# Altium PCB PCB1.PcbDoc
Units mm, origin at the board's own origin, x right, y up, seen from the top; angles counter-clockwise.
Board outline 79.63 x 86.11 mm, 2 copper layers (Top Layer, Bottom Layer); 54 components, 21 nets, 216 pads, 48 vias.
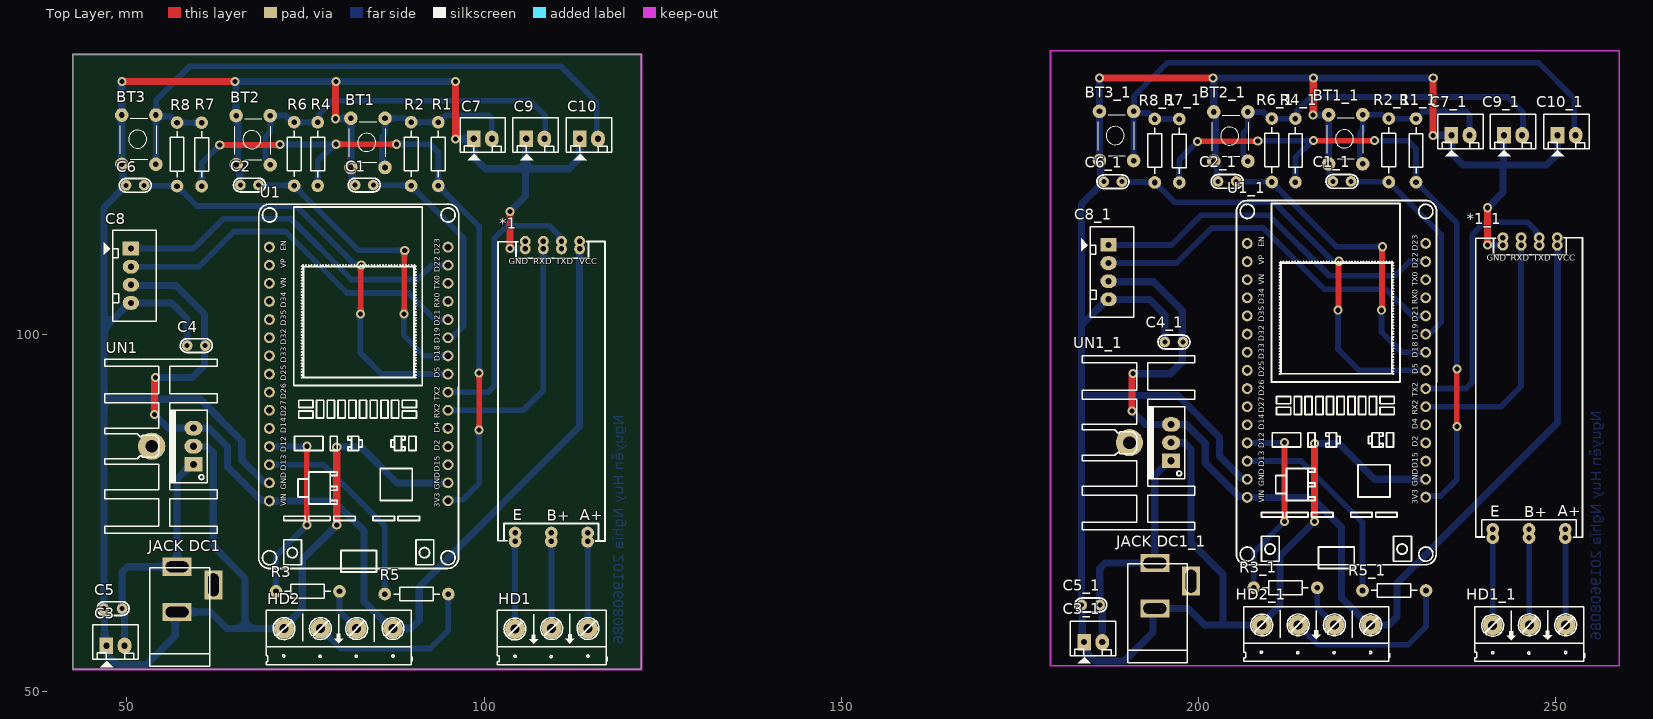
[diagram p0: Top Layer view]
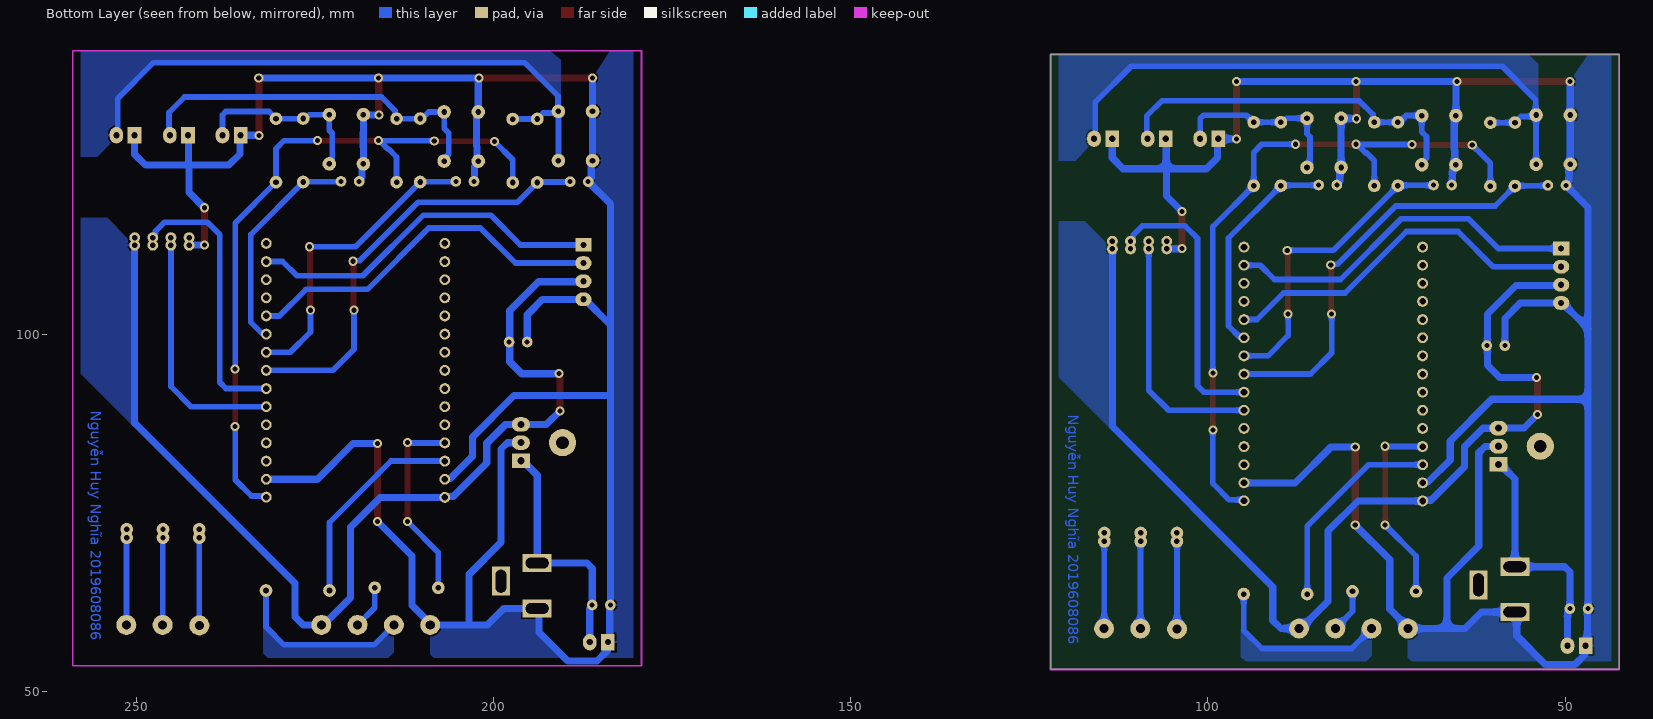
[diagram p1: Bottom Layer view, seen from below]

## Layer stack, top to bottom
Top Solder: solder mask 0.0102, Solder Resist, Dk 3.5
Top Layer: signal copper 0.0356
Dielectric 1: dielectric 0.32, FR-4, Dk 4.8
Bottom Layer: signal copper 0.0356
Bottom Solder: solder mask 0.0102, Solder Resist, Dk 3.5

## Board outline
42.418,53.086 42.418,139.192 122.047,139.192 122.047,53.086

## Design rules (kind name [scope] priority, off if disabled: settings)
Clearance [All] p1: gap=1 ignorepadtopadclearanceinfootprint=FALSE
PolygonConnect [All] p1: connectstyle=Relief reliefconductorwidth=0.254 reliefentries=4 polygonreliefangle="90 Angle" airgapwidth=0.254
RoutingVias [All] p1: holewidth=0.711 width=1.27 viastyle="Through Hole" minholewidth=0.711 minwidth=1.27 maxholewidth=0.711 maxwidth=1.27
SolderMaskExpansion [All] p1: expansion=0.102 istentingtop=FALSE
Width VCC5 [InNet('VCC5')] p1: maxlimit=1 minlimit=1 preferedwidth=1
Width VCC_IN [InNet('VCC_IN')] p2: maxlimit=1 minlimit=1 preferedwidth=1
Width VCC33 [InNet('VCC5')] p3: maxlimit=1 minlimit=1 preferedwidth=1
Width GND [InNet('GND')] p4: maxlimit=1 minlimit=1 preferedwidth=1
Width [All] p5: maxlimit=0.8 minlimit=0.8 preferedwidth=0.8
30 further rules are at their usual default settings.

## Classes and differential pairs
component class Sheet1: *1 BT1 BT2 BT3 C1 C2 C3 C4 C5 C6 C7 C8 C9 C10 HD1 HD2 "JACK DC1" R1 R2 R3 R4 R5 R6 R7 R8 U1 UN1

## Components (designator, comment, footprint, x,y, rotation, side; value= is the part's Value field where it differs from the comment)
*1 "TTL_RS485" "RS-485 Module" 109.106,89.916 r270 top
*1_1 "TTL_RS485" "RS-485 Module" 246.012,90.424 r270 top (schematic designator *1)
BT1 "MENU" "Nut Nhan 4 Chan Cam 6x6" 81.153,123.698 r90 top
BT1_1 "MENU" "Nut Nhan 4 Chan Cam 6x6" 218.059,124.206 r90 top (schematic designator BT1)
BT2 "INC" "Nut Nhan 4 Chan Cam 6x6" 65.075,124.079 r90 top
BT2_1 "INC" "Nut Nhan 4 Chan Cam 6x6" 201.981,124.587 r90 top (schematic designator BT2)
BT3 "DEC" "Nut Nhan 4 Chan Cam 6x6" 49.073,124.153 r90 top
BT3_1 "DEC" "Nut Nhan 4 Chan Cam 6x6" 185.979,124.661 r90 top (schematic designator BT3)
C1 "104" "tu gom" 83.223,120.904 r180 top
C1_1 "104" "tu gom" 220.129,121.412 r180 top (schematic designator C1)
C2 "104" "tu gom" 67.145,120.904 r180 top
C2_1 "104" "tu gom" 204.051,121.412 r180 top (schematic designator C2)
C3 "Header2" Header2 47.117,56.388 r0 top
C3_1 "Header2" Header2 184.023,56.896 r0 top (schematic designator C3)
C4 "104" "tu gom" 59.69,98.425 r180 top
C4_1 "104" "tu gom" 196.596,98.933 r180 top (schematic designator C4)
C5 "104" "tu gom" 48.044,61.595 r180 top
C5_1 "104" "tu gom" 184.95,62.103 r180 top (schematic designator C5)
C6 "104" "tu gom" 51.143,120.863 r180 top
C6_1 "104" "tu gom" 188.049,121.371 r180 top (schematic designator C6)
C7 "Header2" Header2 98.552,127.381 r0 top
C7_1 "Header2" Header2 235.458,127.889 r0 top (schematic designator C7)
C8 "LCD_I2C" Header4 50.546,112.014 r270 top
C8_1 "LCD_I2C" Header4 187.452,112.522 r270 top (schematic designator C8)
C9 "Header2" Header2 105.918,127.381 r0 top
C9_1 "Header2" Header2 242.824,127.889 r0 top (schematic designator C9)
C10 "Header2" Header2 113.411,127.381 r0 top
C10_1 "Header2" Header2 250.317,127.889 r0 top (schematic designator C10)
HD1 "Header 3" HED3 114.554,58.803 r180 top
HD1_1 "Header 3" HED3 251.46,59.311 r180 top (schematic designator HD1)
HD2 "Header 4" HED4 87.251,58.803 r180 top
HD2_1 "Header 4" HED4 224.157,59.311 r180 top (schematic designator HD2)
"JACK DC1" "JACK DC 5.5" "JACK DC 5.5" 59.563,64.287 r90 top value="Jac DC"
"JACK DC1_1" "JACK DC 5.5" "JACK DC 5.5" 196.469,64.795 r90 top value="Jac DC" (schematic designator "JACK DC1")
R1 "10K" R1/4W 93.599,129.692 r270 top value="R1/4W - 1K"
R1_1 "10K" R1/4W 230.505,130.2 r270 top value="R1/4W - 1K" (schematic designator R1)
R2 "1K" R1/4W 89.789,120.818 r90 top value="R1/4W - 1K"
R2_1 "1K" R1/4W 226.695,121.326 r90 top value="R1/4W - 1K" (schematic designator R2)
R3 "1k" R1/4W 79.756,64.008 r180 top value="R1/4W - 1K"
R3_1 "1k" R1/4W 216.662,64.516 r180 top value="R1/4W - 1K" (schematic designator R3)
R4 "10K" R1/4W 76.708,129.692 r270 top value="R1/4W - 1K"
R4_1 "10K" R1/4W 213.614,130.2 r270 top value="R1/4W - 1K" (schematic designator R4)
R5 "1k" R1/4W 94.996,63.627 r180 top value="R1/4W - 1K"
R5_1 "1k" R1/4W 231.902,64.135 r180 top value="R1/4W - 1K" (schematic designator R5)
R6 "1K" R1/4W 73.406,120.818 r90 top value="R1/4W - 1K"
R6_1 "1K" R1/4W 210.312,121.326 r90 top value="R1/4W - 1K" (schematic designator R6)
R7 "10K" R1/4W 60.452,129.637 r270 top value="R1/4W - 1K"
R7_1 "10K" R1/4W 197.358,130.145 r270 top value="R1/4W - 1K" (schematic designator R7)
R8 "1K" R1/4W 57.012,120.762 r90 top value="R1/4W - 1K"
R8_1 "1K" R1/4W 193.918,121.27 r90 top value="R1/4W - 1K" (schematic designator R8)
U1 "ESP32_MODULE copy" ESP32-WIFIMODULE-FOOTPRINT 84.582,92.71 r0 top
U1_1 "ESP32_MODULE copy" ESP32-WIFIMODULE-FOOTPRINT 221.488,93.218 r0 top (schematic designator U1)
UN1 "L78M05CP" QTO-220H2 59.309,84.328 r90 top
UN1_1 "L78M05CP" QTO-220H2 196.215,84.836 r90 top (schematic designator UN1)

## Footprints (in the part's own frame and the unit in brackets; to place one, negate y for a bottom-side part, rotate by r counter-clockwise, add the part's x,y. Pads: shape width x height; smd on the part's side, far side on the other; paste and mask are expansions set on the pad)
ESP32-WIFIMODULE-FOOTPRINT [mil]
  round 60 hole 36: 1(-575.9,768.25) 2(-575.9,668.25) 3(-575.9,568.25) 4(-575.9,468.25) 5(-575.9,368.25) 6(-575.9,268.25) 7(-575.9,168.25) 8(-575.9,68.25) 9(-575.9,-31.75) 10(-575.9,-131.75) 11(-575.9,-231.75) 12(-575.9,-331.75) 13(-575.9,-431.75) 14(-575.9,-531.75) 15(-575.9,-631.75) 16(408.35,-630.18) 17(408.35,-531.75) 18(408.35,-431.75) 19(408.35,-331.75) 20(408.35,-231.75) 21(408.35,-131.75) 22(408.35,-31.75) 23(408.35,68.25) 24(408.35,168.25) 25(408.35,268.25) 26(408.35,368.25) 27(408.35,468.25) 28(408.35,568.25) 29(408.35,668.25) 30(408.35,768.25)
  silkscreen extent -635,-1023 468,1005
Header2 [mil] "CON2"
  rect 75x90 hole 34: 1(0,0)
  oval 75x90 hole 34: 2(100,0)
  silkscreen extent -75,-118 175,115, body extent -68,-70 168,107, height 236
Header4 [mil] "CON4"
  rect 75x90 hole 34: 1(0,0)
  oval 75x90 hole 34: 2(100,0) 3(200,0) 4(300,0)
  silkscreen extent -100,-150 400,140, body extent -90,-90 398,136, height 276
HED3 [mil] "Header 3, 3 pin, hight 300mil, Pin to Pin 200, Colour Green"
  round 110 hole 50: 1(0,0) 2(200,0) 3(402.62,2.62)
  silkscreen extent -106,-100 500,200
HED4 [mil] "Header 4, 4 pin, hight 300mil, Pin to Pin 200, Colour Green"
  round 110 hole 50: 1(0,0) 2(200,0) 3(400.06,0.06) 4(600.39,0.39)
  silkscreen extent -106,-100 700,200
"JACK DC 5.5" [mm] "Jac DC input"
  rect 2.54x4.064 hole 1.5 slot 3.2 at 90 deg: 1(3.175,2.54) 2(-3.175,2.54)
  rect 4.064x2.54 hole 1.5 slot 3.2 at 0 deg: 3(0.635,-2.54)
  silkscreen extent -10.79,-2.03 3.05,6.35, body extent -10.42,-2.67 3.4,6.84, height 11.02
"Nut Nhan 4 Chan Cam 6x6" [mil] "SW button 4pin, 250 x250 mil"
  round 75 hole 31: 1(-13,-8) 1(258,-8) 2(-13,-196) 2(258,-196)
  silkscreen extent 15,-215 240,0, body extent -31,-225 281,19, height 276
QTO-220H2 [mil] "TO-220 - 1-2-3"
  round 150 hole 70: 0(0,230)
  rect 80x100 hole 39: 1(-100,0)
  oval 80x100 hole 39: 2(0,0) 3(100,0)
  silkscreen extent -480,-130 480,490, body extent -449,-177 453,469, height 1206
R1/4W [mil]
  round 70 hole 31: 1(0,0) 2(350,0)
  silkscreen extent 48,-38 302,38, body extent -40,-47 386,47, height 111
"RS-485 Module" [mil] "RS-485 TTL Module"
  round 60 hole 30: 1(-910,168.5) 1(-868,168.5) 2(-910,68.5) 2(-868,68.5) 3(-910,-31.5) 3(-868,-31.5) 4(-910,-131.5) 4(-868,-131.5)
  round 70 hole 30: 5(698,-187.5) 5(744,-187.5) 6(698,12.5) 6(744,12.5) 7(698,212.5) 7(744,212.5)
  silkscreen extent -909,-281 742,308, body extent -949,-282 808,310, height 110
"tu gom" [mm] "Tu gom mini"
  round 1.5 hole 0.7: 1(-1.27,0) 2(1.27,0)
  silkscreen extent -2.25,-0.97 2.22,0.97, body extent -2.92,-0.85 2.92,0.85, height 6.12

## Part data
BT1 BT1_1 BT2 BT2_1 BT3 BT3_1: library part "Nut Nhan 4 Chan Cam 6x6", "Nut Nhan 4 Chan 6x6mm", Ma_Hang=MH004584, Ten="Nút Nhấn 4 Chân 6x6x5MM DIP"
C1 C1_1 C2 C2_1 C4 C4_1 C5 C5_1 C6 C6_1: library part "Tu gom 104 50V", "Cắm", Chung_Loai=Cắm, Don_Vi=Con, Ma_Hang=MH004761, So_Chan=2, Ten_Linh_Kien="Tụ gốm 104 100nF 50V"
C3 C3_1 C7 C7_1 C9 C9_1 C10 C10_1: "Header IDC, 2 x 1 Pin Vertical 2.54mm Pitch (Non-Boxed, Male)", Manufacturer="W¨¹rth Elektronik eiSos GmbH", partNo=613002143121, ComponentLink1 Description=Manufacturer, ComponentLink1URL=http://www.we-online.com, ComponentLink2 Description=Datasheet, ComponentLink2URL=http://katalog.we-online.de/em/datasheet/6130xx143121.pdf, Created by="Karrer Zheng", Created Date="29 March 2013", NoPins=02
C8 C8_1: library part Header4, "Header IDC, 4 x 1 Pin Vertical 2.54mm Pitch (Non-Boxed, Male)", Manufacturer="W¨¹rth Elektronik eiSos GmbH", partNo=613002143121, ComponentLink1 Description=Manufacturer, ComponentLink1URL=http://www.we-online.com, ComponentLink2 Description=Datasheet, ComponentLink2URL=http://katalog.we-online.de/em/datasheet/6130xx143121.pdf, Created by="Karrer Zheng", Created Date="29 March 2013", NoPins=02
HD1 HD1_1: library part Hed3, "Header 3 (Green)"
HD2 HD2_1: library part Hed4, "Header 4 (Green)"
R1 R1_1 R2 R2_1 R3 R3_1 R4 R4_1 R5 R5_1 R6 R6_1 R7 R7_1 R8 R8_1: library part R1/4W, "Resistor 1/4W"
UN1 UN1_1: "Positive Voltage Regulator", ComponentLink1Description="Manufacturer Link", ComponentLink1URL=http://www.st.com/, ComponentLink2Description=Datasheet, ComponentLink2URL=http://www.st.com/stonline/products/literature/ds/2146/l78m05c.pdf, DatasheetVersion=Apr-1994, LatestRevisionDate=17-Jul-2002, LatestRevisionNote="Re-released for DXP Platform.", Note="Tab is connected to pin 3 (GND).", PackageDescription="TO, Thru-Hole, Vertical, Heatsink Mounted; 3 In-Line Leads; Pitch 2.54 mm; Pin sequence 1, 3, 2", PackageReference=ISOWATT220AB, PackageVersion=Jul-1998, Published=24-Aug-2001, Publisher="Altium Limited"

## Via types
v1: diameter 1.27, hole 0.711, Top Layer to Bottom Layer, 48 vias

## Nets (pads, with @x,y where several pads share a name; then routed paths per layer and width w, separated by ;. In a path a pad name is that pad's centre, name@x,y a point inside that pad or via, vN(x,y) a via of type N, cw(c..) or ccw(c..) an arc to the next point about the centre after c; other vN are vias at no path point)
GND: "JACK DC1.2" *1.4 BT1.1 BT2.1 BT3.1 C1.2 C2.2 C3.1 C4.2 C5.2 C6.2 C7.1 C8.4 C9.1 C10.1 HD2.4 U1.14 U1.17 UN1.2 | length 364.8
  Top Layer w1: v1(49.276,135.382) v1(65.151,135.382) ; v1(79.183,130.187) 79.215,130.22 79.215,135.349 v1(79.248,135.382) ; v1(79.375,73.279) v1(79.375,84.201) ; v1(95.988,127.357) 96,127.369 96,135.37 v1(96.012,135.382) ; v1(103.632,112.014) v1(103.632,117.221)
  Bottom Layer w1: v1(49.276,135.382) 49.276,123.822 49.449,123.649 C6.2@49.449,121.422 ; C6.2 46.774,117.765 46.774,100.813 ; C4.2 58.42,102.235 56.261,104.394 50.355,104.394 46.774,100.813 ; UN1.2 59.333,84.304 61.2,84.304 62.079,83.425 62.079,70.37 66.548,65.901 66.548,58.793 ; C2.2 65.779,121 65.779,123.003 65.278,123.504 65.451,123.677 65.451,125.805 65.508,125.862 65.508,130.157 65.278,130.387 65.278,135.182 65.151,135.309 v1(65.151,135.382) v1(96.012,135.382) ; U1.14 69.854,79.304 69.195,79.304 66.079,82.42 66.079,85.082 60.253,90.908 46.774,90.908 ; v1(79.183,130.187) 79.215,130.219 81.324,130.219 81.356,130.251 81.356,127.797 81.383,127.77 81.383,125.735 81.356,125.708 81.356,123.368 81.529,123.195 81.529,121.463 81.953,121.039 C1.2 ; v1(79.375,73.279) 74.549,68.453 74.549,61.545 72.001,58.997 HD2.4 66.548,58.793 ; v1(79.375,84.201) 82.804,84.201 87.801,79.204 U1.17 ; v1(95.988,127.357) 96,127.369 98.54,127.369 C7.1 98.639,127.294 98.639,124.754 100.203,123.19 105.842,123.19 ; v1(103.632,112.014) 103.657,111.989 105.74,111.989 *1.4@105.766,111.963 ; v1(103.632,117.221) 105.791,119.38 105.791,123.139 105.842,123.19 ; *1.4@105.766,113.03 *1.4@105.842,113.106 ; C9.1 105.842,127.305 105.842,123.19 ; C10.1 113.411,124.714 111.887,123.19 105.842,123.19 ; 46.774,90.908 46.774,100.813 ; 46.774,90.908 C5.2 46.87,61.499 46.87,56.635 C3.1 47.204,56.301 47.204,55.182 48.641,53.745 52.729,53.745 56.769,57.785 56.769,60.858 57.023,61.112 61.697,61.112 64.016,58.793 66.548,58.793
IN_1: C1.1 R2.1 U1.25 | length 30.9
  Bottom Layer w0.8: C1.1 84.536,120.861 89.746,120.861 R2.1 97.116,113.491 97.116,101.168 95.61,99.662 95.093,99.662 U1.25
IN_2: C2.1 R6.1 U1.24 | length 43.6
  Top Layer w0.8: v1(88.773,102.87) 88.837,102.933 88.837,111.697 v1(88.9,111.76)
  Bottom Layer w0.8: C2.1 68.458,120.861 73.363,120.861 R6.1 82.464,111.76 v1(88.9,111.76) ; v1(88.773,102.87) 88.773,99.822 91.611,96.984 U1.24
IN_3: C6.1 R8.1 U1.23 | length 60.9
  Top Layer w0.8: v1(82.677,102.87) 82.74,102.933 82.74,109.661 v1(82.804,109.725)
  Bottom Layer w0.8: C6.1 52.464,120.813 56.962,120.813 R8.1 59.789,117.986 73.693,117.986 81.863,109.815 82.714,109.815 v1(82.804,109.725) ; v1(82.677,102.87) 82.677,97.409 85.642,94.444 U1.23
Net*1_5: *1.5 HD1.3 | length 12.3
  Bottom Layer w0.8: HD1.3 104.335,58.744 104.335,71.011 *1.5@104.343,71.018
Net*1_6: *1.6 HD1.2 | length 12.2
  Bottom Layer w0.8: *1.6@109.423,71.018 109.449,70.993 109.449,58.828 HD1.2
Net*1_7: *1.7 HD1.1 | length 12.2
  Bottom Layer w0.8: *1.7@114.503,71.018 114.529,70.993 114.529,58.828 HD1.1
NetR3_2: R3.2 U1.12 | length 27.4
  Top Layer w0.8: v1(75.184,73.279) v1(75.184,84.328)
  Bottom Layer w0.8: U1.12 75.14,84.284 v1(75.184,84.328) ; R3.2 70.866,68.961 v1(75.184,73.279)
NetR5_2: R5.2 U1.13 | length 29.2
  Bottom Layer w0.8: U1.13 77.514,81.744 86.106,73.152 R5.2
OUT_BTN1: BT1.2 C7.2 R1.1 R2.2 | length 25.4
  Bottom Layer w0.8: BT1.2@86.131,123.368 86.131,123.667 85.722,124.076 85.722,127.659 86.131,128.069 86.131,130.251 88.981,130.251 89.397,129.835 R2.2@89.789,129.835 ; R2.2@90.135,129.594 90.241,129.7 93.234,129.7 R1.1@93.413,129.879 ; R1.1 94.59,130.683 100.623,130.683 101.092,130.214 C7.2
OUT_BTN2: BT2.2 C9.2 R4.1 R6.2 | length 52.2
  Bottom Layer w0.8: BT2.2@70.053,123.749 70.053,124.048 69.402,124.699 69.402,127.698 70.053,128.348 70.053,130.632 72.217,130.632 73.141,129.708 R6.2 73.414,129.7 76.7,129.7 R4.1 76.895,129.88 76.895,130.777 78.83,132.712 106.429,132.712 108.585,130.556 108.585,127.508 C9.2
OUT_BTN3: BT3.2 C10.2 R7.1 R8.2 | length 86.8
  Bottom Layer w0.8: BT3.2@54.051,123.822 BT3.2@54.051,130.706 ; R7.1 60.444,129.644 57.02,129.644 R8.2 56.17,130.494 54.263,130.494 BT3.2@54.051,130.706 ; C10.2 115.764,127.568 115.764,132.522 110.744,137.541 58.801,137.541 54.118,132.858 54.118,130.773 BT3.2@54.051,130.706
R_A: HD2.2 R3.1 | length 6.2
  Bottom Layer w0.8: R3.1 79.756,61.217 HD2.2
R_B: HD2.3 R5.1 | length 25.2
  Bottom Layer w0.8: HD2.3 79.884,56.006 92.455,56.006 94.996,58.547 R5.1
RX2: *1.3 U1.21 | length 34.3
  Bottom Layer w0.8: U1.21 105.493,89.364 108.306,92.177 *1.3@108.306,111.963
SCL: C8.1 U1.29 | length 50.5
  Bottom Layer w0.8: C8.1 59.356,112.014 63.528,116.186 72.947,116.186 81.442,107.69 90.672,107.69 92.666,109.684 U1.29
SDA: C8.2 U1.26 | length 51.5
  Bottom Layer w0.8: C8.2 60.071,109.474 64.983,114.386 72.201,114.386 80.796,105.791 89.408,105.791 93.135,102.064 U1.26
TX2: *1.2 U1.22 | length 38.8
  Bottom Layer w0.8: U1.22 100.584,91.904 101.473,92.793 101.473,113.45 103.209,115.186 104.864,115.186 104.87,115.192 109.201,115.192 110.468,113.926 110.468,113.604 110.846,113.226 *1.2@110.846,113.03
VCC5: *1.1 C4.1 C8.3 HD2.1 U1.15 UN1.3 | length 150.8
  Top Layer w1: v1(53.848,88.773) 53.848,93.78 53.975,93.907 v1(53.975,93.98)
  Bottom Layer w1: C8.3 50.633,106.847 56.856,106.847 60.864,102.839 60.864,98.521 C4.1 60.864,98.329 60.864,95.662 59.182,93.98 v1(53.975,93.98) ; v1(53.848,88.773) 55.753,86.868 UN1.3 ; UN1.3@59.309,86.844 61.489,86.844 64.079,84.254 64.079,81.463 68.778,76.764 69.854,76.764 U1.15 79.01,76.664 83.185,72.488 83.185,62.611 86.993,58.803 89.791,58.803 90.922,59.934 90.922,64.633 113.386,87.097 *1.1@113.386,111.963
VCC33: R1.2 R4.2 R7.2 U1.16 | length 98.9
  Top Layer w0.8: v1(62.992,126.492) 63.024,126.524 71.406,126.524 v1(71.438,126.555) ; v1(79.248,126.619) v1(87.757,126.619) ; v1(99.314,86.614) v1(99.314,94.615)
  Bottom Layer w0.8: R7.2 60.452,123.952 v1(62.992,126.492) ; v1(71.438,126.555) 71.469,126.587 79.216,126.587 v1(79.248,126.619) ; R4.2 76.708,124.333 77.773,125.398 77.9,125.398 79.057,126.555 v1@79.184,126.555 ; v1(87.757,126.619) 92.456,126.619 93.599,125.476 R1.2 99.314,115.087 v1(99.314,94.615) ; U1.16 95.093,76.842 97.035,76.842 99.314,79.121 v1(99.314,86.614)
VCC_IN: "JACK DC1.1" C3.2 C5.1 UN1.1 | length 33.9
  Bottom Layer w1: C3.2 49.657,61.117 49.314,61.46 C5.1 49.314,66.713 50.063,67.462 57.023,67.462 57.023,79.756 59.055,81.788 UN1.1
pads on no net: "JACK DC1.3" "JACK DC1_1.1" "JACK DC1_1.2" "JACK DC1_1.3" *1_1.1 *1_1.2 *1_1.3 *1_1.4 *1_1.5 *1_1.6 *1_1.7 BT1_1.1 BT1_1.2 BT2_1.1 BT2_1.2 BT3_1.1 BT3_1.2 C1_1.1 C1_1.2 C2_1.1 C2_1.2 C3_1.1 C3_1.2 C4_1.1 C4_1.2 C5_1.1 C5_1.2 C6_1.1 C6_1.2 C7_1.1 C7_1.2 C8_1.1 C8_1.2 C8_1.3 C8_1.4 C9_1.1 C9_1.2 C10_1.1 C10_1.2 HD1_1.1 HD1_1.2 HD1_1.3 HD2_1.1 HD2_1.2 HD2_1.3 HD2_1.4 R1_1.1 R1_1.2 R2_1.1 R2_1.2 R3_1.1 R3_1.2 R4_1.1 R4_1.2 R5_1.1 R5_1.2 R6_1.1 R6_1.2 R7_1.1 R7_1.2 R8_1.1 R8_1.2 U1.1 U1.2 U1.3 U1.4 U1.5 U1.6 U1.7 U1.8 U1.9 U1.10 U1.11 U1.18 U1.19 U1.20 U1.27 U1.28 U1.30 U1_1.1 U1_1.2 U1_1.3 U1_1.4 U1_1.5 U1_1.6 U1_1.7 U1_1.8 U1_1.9 U1_1.10 U1_1.11 U1_1.12 U1_1.13 U1_1.14 U1_1.15 U1_1.16 U1_1.17 U1_1.18 U1_1.19 U1_1.20 U1_1.21 U1_1.22 U1_1.23 U1_1.24 U1_1.25 U1_1.26 U1_1.27 U1_1.28 U1_1.29 U1_1.30 UN1.0 UN1_1.0 UN1_1.1 UN1_1.2 UN1_1.3
copper on no net: | length 1248.2
  Top Layer w0.8: v1(199.898,127) 199.93,127.032 208.312,127.032 v1(208.343,127.063) ; v1(212.09,73.787) v1(212.09,84.836) ; v1(216.154,127.127) v1(224.663,127.127) ; v1(219.583,103.378) 219.647,103.441 219.647,110.169 v1(219.71,110.233) ; v1(225.679,103.378) 225.742,103.441 225.742,112.204 v1(225.806,112.268) ; v1(236.22,87.122) v1(236.22,95.123)
  Top Layer w1: v1(186.182,135.89) v1(202.057,135.89) ; v1(190.754,89.281) 190.754,94.288 190.881,94.415 v1(190.881,94.488) ; v1(216.089,130.695) 216.121,130.728 216.121,135.857 v1(216.154,135.89) ; v1(216.281,73.787) v1(216.281,84.709) ; v1(232.894,127.865) 232.906,127.877 232.906,135.878 v1(232.918,135.89) ; v1(240.538,112.522) v1(240.538,117.729)
  Bottom Layer w0.8: 187.452,109.982 196.977,109.982 201.889,114.894 209.107,114.894 217.702,106.299 226.314,106.299 230.041,102.572 231.86,102.572 ; 187.452,112.522 196.262,112.522 200.434,116.694 209.853,116.694 218.348,108.198 227.578,108.198 229.572,110.192 231.86,110.192 ; 189.319,121.371 189.37,121.321 193.868,121.321 193.918,121.27 196.695,118.494 210.599,118.494 218.769,110.323 219.62,110.323 v1(219.71,110.233) ; 190.957,124.33 190.957,131.214 ; 197.358,121.255 197.358,124.46 v1(199.898,127) ; 197.358,130.145 197.35,130.152 193.926,130.152 193.918,130.16 193.076,131.002 191.169,131.002 190.957,131.214 ; 205.321,121.412 205.364,121.369 210.269,121.369 210.312,121.326 219.37,112.268 v1(225.806,112.268) ; 206.86,82.252 214.42,82.252 223.012,73.66 223.012,64.135 ; 206.86,84.792 212.046,84.792 v1(212.09,84.836) ; 206.959,124.257 206.959,124.556 206.308,125.207 206.308,128.206 206.959,128.856 206.959,131.14 209.123,131.14 210.047,130.216 210.312,130.216 210.32,130.208 213.606,130.208 213.614,130.2 213.801,130.388 213.801,131.285 215.736,133.22 243.335,133.22 245.491,131.064 245.491,128.016 245.364,127.889 ; 207.772,64.516 207.772,69.469 v1(212.09,73.787) ; v1(208.343,127.063) 208.375,127.095 216.122,127.095 v1(216.154,127.127) ; 213.614,121.31 213.614,124.841 214.679,125.906 214.806,125.906 215.963,127.063 v1@216.09,127.063 ; 213.995,59.309 216.79,56.514 229.361,56.514 231.902,59.055 231.902,64.135 ; 216.662,64.516 216.662,61.725 219.077,59.311 ; v1(219.583,103.378) 219.583,97.917 222.548,94.952 231.86,94.952 ; 221.399,121.412 221.442,121.369 226.652,121.369 226.695,121.326 234.022,113.999 234.022,101.676 232.516,100.17 231.999,100.17 231.86,100.032 ; 223.037,123.876 223.037,124.175 222.628,124.584 222.628,128.167 223.037,128.577 223.037,130.759 225.887,130.759 226.303,130.343 226.695,130.343 ; v1(224.663,127.127) 229.362,127.127 230.505,125.984 230.505,121.31 236.22,115.595 v1(236.22,95.123) ; v1(225.679,103.378) 225.679,100.33 228.517,97.492 231.86,97.492 ; 227.041,130.102 227.147,130.208 230.14,130.208 230.319,130.387 ; 230.505,130.2 231.496,131.191 237.529,131.191 237.998,130.722 237.998,127.889 ; 231.86,77.211 231.999,77.35 233.941,77.35 236.22,79.629 v1(236.22,87.122) ; 231.86,89.872 242.399,89.872 245.212,92.685 245.212,112.471 ; 231.86,92.412 237.49,92.412 238.379,93.301 238.379,113.958 240.115,115.694 241.77,115.694 241.776,115.7 246.107,115.7 247.374,114.434 247.374,114.112 247.752,113.734 247.752,113.538 ; 241.233,59.244 241.241,59.252 241.241,71.519 241.249,71.526 ; 246.329,71.526 246.355,71.501 246.355,59.336 246.38,59.311 ; 251.409,71.526 251.435,71.501 251.435,59.336 251.46,59.311 ; 252.857,127.889 252.67,128.076 252.67,133.03 247.65,138.049 195.707,138.049 191.024,133.366 191.024,131.281 190.957,131.214
  Bottom Layer w1: v1(186.182,135.89) 186.182,124.33 186.355,124.157 186.355,121.93 ; 186.563,56.896 186.563,61.625 186.22,61.968 186.22,62.103 186.22,67.221 186.969,67.97 193.929,67.97 193.929,80.264 195.961,82.296 196.215,82.296 ; 186.779,121.371 183.68,118.273 183.68,101.321 ; 187.452,107.442 187.539,107.355 193.762,107.355 197.77,103.347 197.77,99.029 197.866,98.933 197.77,98.837 197.77,96.17 196.088,94.488 v1(190.881,94.488) ; v1(190.754,89.281) 192.659,87.376 196.215,87.376 ; 195.326,98.933 195.326,102.743 193.167,104.902 187.261,104.902 183.68,101.321 ; 196.215,84.836 196.239,84.812 198.106,84.812 198.985,83.933 198.985,70.878 203.454,66.409 203.454,59.301 ; 196.215,87.352 198.395,87.352 200.985,84.762 200.985,81.971 205.684,77.272 206.76,77.272 206.86,77.172 215.916,77.172 220.091,72.996 220.091,63.119 223.899,59.311 226.697,59.311 227.828,60.442 227.828,65.141 250.292,87.605 250.292,112.471 ; 202.781,121.412 202.685,121.508 202.685,123.511 202.184,124.012 202.357,124.185 202.357,126.313 202.414,126.37 202.414,130.665 202.184,130.895 202.184,135.69 202.057,135.817 v1(202.057,135.89) v1(232.918,135.89) ; 206.86,79.712 206.76,79.812 206.101,79.812 202.985,82.928 202.985,85.59 197.159,91.416 183.68,91.416 ; v1(216.089,130.695) 216.121,130.727 218.23,130.727 218.262,130.759 218.262,128.305 218.289,128.278 218.289,126.243 218.262,126.216 218.262,123.876 218.435,123.703 218.435,121.971 218.859,121.547 218.859,121.412 ; v1(216.281,73.787) 211.455,68.961 211.455,62.053 208.907,59.505 208.907,59.301 203.454,59.301 ; v1(216.281,84.709) 219.71,84.709 224.707,79.712 231.86,79.712 ; v1(232.894,127.865) 232.906,127.877 235.446,127.877 235.458,127.889 235.545,127.802 235.545,125.262 237.109,123.698 242.748,123.698 ; v1(240.538,112.522) 240.563,112.497 242.646,112.497 242.672,112.471 ; v1(240.538,117.729) 242.697,119.888 242.697,123.647 242.748,123.698 ; 242.672,113.538 242.748,113.614 ; 242.824,127.889 242.748,127.813 242.748,123.698 ; 250.317,127.889 250.317,125.222 248.793,123.698 242.748,123.698 ; 183.68,91.416 183.68,62.103 183.776,62.007 183.776,57.143 184.023,56.896 184.11,56.809 184.11,55.69 185.547,54.253 189.635,54.253 193.675,58.293 193.675,61.366 193.929,61.62 198.603,61.62 200.922,59.301 203.454,59.301 ; 183.68,91.416 183.68,101.321

## Polygon pours and split planes (outlines as drawn)
no net on Bottom Layer "NONET_L02_P024" (solid, pour order 24): 213.995,59.309 213.995,55.499 215.9,53.594 230.505,53.594 232.283,55.372 232.283,59.436 229.361,56.514 216.79,56.514
no net on Bottom Layer "NONET_L02_P023" (solid, pour order 23): 180.461,54.731 181.089,54.102 189.992,54.102 190.5,53.594 207.264,53.594 208.907,55.237 208.907,59.301 200.922,59.301 198.603,61.62 193.929,61.62 193.929,58.547 189.635,54.253 185.396,54.253 184.15,55.499 183.382,54.731
no net on Bottom Layer "NONET_L02_P022" (solid, pour order 22): 250.292,86.97 250.292,112.471 254.152,116.332 258.953,116.332 258.953,95.631
no net on Bottom Layer "NONET_L02_P021" (solid, pour order 21): 252.857,127.508 255.524,124.841 258.953,124.841 258.953,139.573 258.826,139.7 192.151,139.7 190.627,138.43 190.627,133.223 195.707,138.049 247.65,138.049 252.857,132.842
no net on Bottom Layer "NONET_L02_P020" (solid, pour order 20): 186.182,135.89 183.68,139.7 182.88,139.7 179.324,139.7 179.324,53.594 188.976,53.594 193.929,58.547 193.929,58.928 189.484,54.483 185.547,54.483 183.68,56.35 183.68,118.273 186.779,121.371 186.182,121.968
VCC5 on Bottom Layer "VCC5_L02_P002" (solid, pour order 2): 113.386,86.462 113.386,111.963 117.246,115.824 122.047,115.824 122.047,95.123
R_B on Bottom Layer "R_B_L02_P005" (solid, pour order 5): 77.089,58.801 77.089,54.991 78.994,53.086 93.599,53.086 95.377,54.864 95.377,58.928 92.455,56.006 79.884,56.006
GND on Bottom Layer "GND_L02_P004" (solid, pour order 4): 43.555,54.223 44.183,53.594 53.086,53.594 53.594,53.086 70.358,53.086 72.001,54.729 72.001,58.793 64.016,58.793 61.697,61.112 57.023,61.112 57.023,58.039 52.729,53.745 48.49,53.745 47.244,54.991 46.476,54.223
OUT_BTN3 on Bottom Layer "OUT_BTN3_L02_P001" (solid, pour order 1): 115.951,127 118.618,124.333 122.047,124.333 122.047,139.065 121.92,139.192 55.245,139.192 53.721,137.922 53.721,132.715 58.801,137.541 110.744,137.541 115.951,132.334
GND on Bottom Layer "GND_L02_P000" (solid, pour order 0): 49.276,135.382 46.774,139.192 45.974,139.192 42.418,139.192 42.418,53.086 52.07,53.086 57.023,58.039 57.023,58.42 52.578,53.975 48.641,53.975 46.774,55.842 46.774,117.765 49.873,120.863 49.276,121.46

## Keep-outs
Keep-Out Layer:
  lines w0.254: 42.418,53.086 122.047,53.086 122.047,135.001 122.047,139.192 42.418,139.192 42.418,138.557 42.418,53.086 ; 179.324,53.594 179.324,139.065 179.324,139.7 258.953,139.7 258.953,135.509 258.953,53.594 179.324,53.594

## Other copper
Bottom Layer:
  text "Nguyễn Huy Nghĩa 2019608086" at 256.952,89.281 h2.52 r90
  text "Nguyễn Huy Nghĩa 2019608086" at 120.046,88.773 h2.52 r90

## Text inside footprints (layer, text, board x,y; h text height)
*1: Top Overlay "RXD" at 106.858,109.449 h1.52; Top Overlay "TXD" at 110.033,109.449 h1.52; Top Overlay "VCC" at 113.36,109.449 h1.52; Top Overlay "GND" at 103.48,109.449 h1.52; Top Overlay "A+" at 113.436,73.99 h1.52; Top Overlay "B+" at 108.763,73.863 h1.52; Top Overlay "E" at 103.988,73.939 h1.52
*1_1: Top Overlay "E" at 240.894,74.447 h1.52; Top Overlay "B+" at 245.669,74.371 h1.52; Top Overlay "A+" at 250.342,74.498 h1.52; Top Overlay "GND" at 240.386,109.957 h1.52; Top Overlay "VCC" at 250.266,109.957 h1.52; Top Overlay "TXD" at 246.939,109.957 h1.52; Top Overlay "RXD" at 243.764,109.957 h1.52
U1: Top Overlay "D23" at 93.829,111.224 h0.75 r90; Top Overlay "D22" at 93.829,108.723 h0.75 r90; Top Overlay "TX0" at 93.829,106.224 h0.75 r90; Top Overlay "RX0" at 93.829,103.723 h0.75 r90; Top Overlay "D21" at 93.829,101.224 h0.75 r90; Top Overlay "D19" at 93.829,98.723 h0.75 r90; Top Overlay "D18" at 93.829,96.223 h0.75 r90; Top Overlay "D5" at 93.829,93.923 h0.75 r90; Top Overlay "TX2" at 93.829,90.724 h0.75 r90; Top Overlay "RX2" at 93.829,88.223 h0.75 r90; Top Overlay "D4" at 93.829,86.223 h0.75 r90; Top Overlay "D2" at 93.829,83.724 h0.75 r90; Top Overlay "D15" at 93.829,80.724 h0.75 r90; Top Overlay "GND" at 93.829,78.223 h0.75 r90; Top Overlay "3V3" at 93.829,75.724 h0.75 r90; Top Overlay "EN" at 72.329,111.723 h0.75 r90; Top Overlay "VP" at 72.329,109.224 h0.75 r90; Top Overlay "VN" at 72.329,106.423 h0.75 r90; Top Overlay "D34" at 72.329,103.723 h0.75 r90; Top Overlay "D35" at 72.329,101.224 h0.75 r90; Top Overlay "D32" at 72.329,98.524 h0.75 r90; Top Overlay "D33" at 72.329,96.023 h0.75 r90; Top Overlay "D25" at 72.329,93.524 h0.75 r90; Top Overlay "D26" at 72.329,90.923 h0.75 r90; Top Overlay "D27" at 72.329,88.524 h0.75 r90; Top Overlay "D14" at 72.329,86.124 h0.75 r90; Top Overlay "D12" at 72.329,83.523 h0.75 r90; Top Overlay "D13" at 72.329,80.923 h0.75 r90; Top Overlay "GND" at 72.329,78.223 h0.75 r90; Top Overlay "VIN" at 72.329,75.923 h0.75 r90
U1_1: Top Overlay "D23" at 230.735,111.732 h0.75 r90; Top Overlay "D22" at 230.735,109.231 h0.75 r90; Top Overlay "TX0" at 230.735,106.732 h0.75 r90; Top Overlay "RX0" at 230.735,104.231 h0.75 r90; Top Overlay "D21" at 230.735,101.732 h0.75 r90; Top Overlay "D19" at 230.735,99.231 h0.75 r90; Top Overlay "D18" at 230.735,96.731 h0.75 r90; Top Overlay "D5" at 230.735,94.431 h0.75 r90; Top Overlay "TX2" at 230.735,91.232 h0.75 r90; Top Overlay "RX2" at 230.735,88.731 h0.75 r90; Top Overlay "D4" at 230.735,86.731 h0.75 r90; Top Overlay "D2" at 230.735,84.232 h0.75 r90; Top Overlay "D15" at 230.735,81.232 h0.75 r90; Top Overlay "GND" at 230.735,78.731 h0.75 r90; Top Overlay "3V3" at 230.735,76.232 h0.75 r90; Top Overlay "EN" at 209.235,112.231 h0.75 r90; Top Overlay "VP" at 209.235,109.732 h0.75 r90; Top Overlay "VN" at 209.235,106.931 h0.75 r90; Top Overlay "D34" at 209.235,104.231 h0.75 r90; Top Overlay "D35" at 209.235,101.732 h0.75 r90; Top Overlay "D32" at 209.235,99.032 h0.75 r90; Top Overlay "D33" at 209.235,96.531 h0.75 r90; Top Overlay "D25" at 209.235,94.032 h0.75 r90; Top Overlay "D26" at 209.235,91.431 h0.75 r90; Top Overlay "D27" at 209.235,89.032 h0.75 r90; Top Overlay "D14" at 209.235,86.632 h0.75 r90; Top Overlay "D12" at 209.235,84.031 h0.75 r90; Top Overlay "D13" at 209.235,81.431 h0.75 r90; Top Overlay "GND" at 209.235,78.731 h0.75 r90; Top Overlay "VIN" at 209.235,76.431 h0.75 r90